# Altium PCB WLC-v0.0.PcbDoc
Units mm, origin at the board's own origin, x right, y up, seen from the top; angles counter-clockwise.
Board outline 99.9 x 99.9 mm, 2 copper layers (Top Layer, Bottom Layer); 50 components, 53 nets, 186 pads, 42 vias.
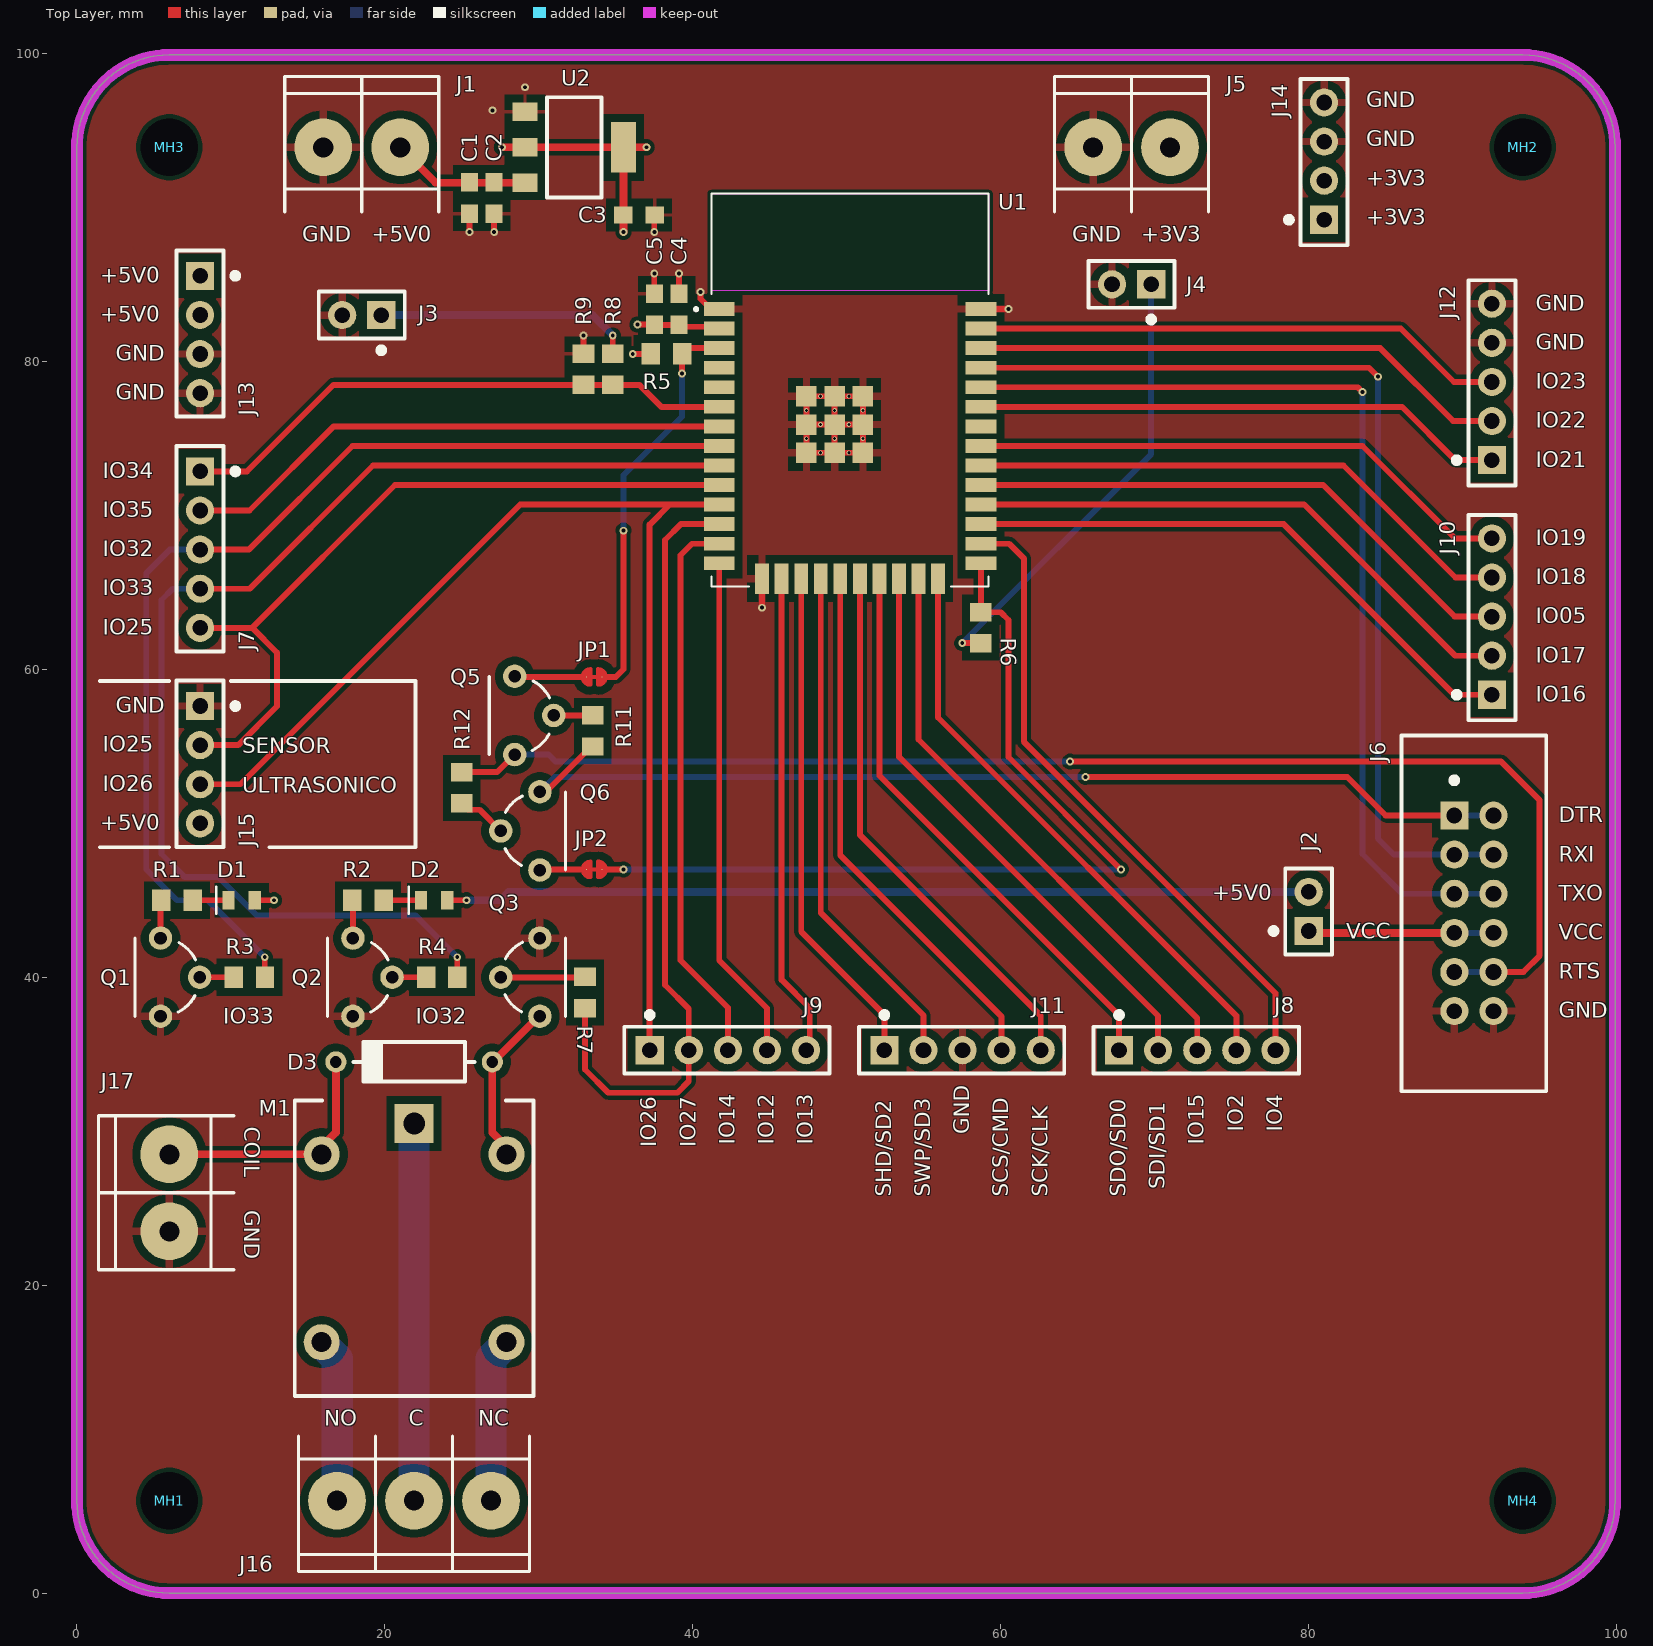
[diagram p0: Top Layer view]
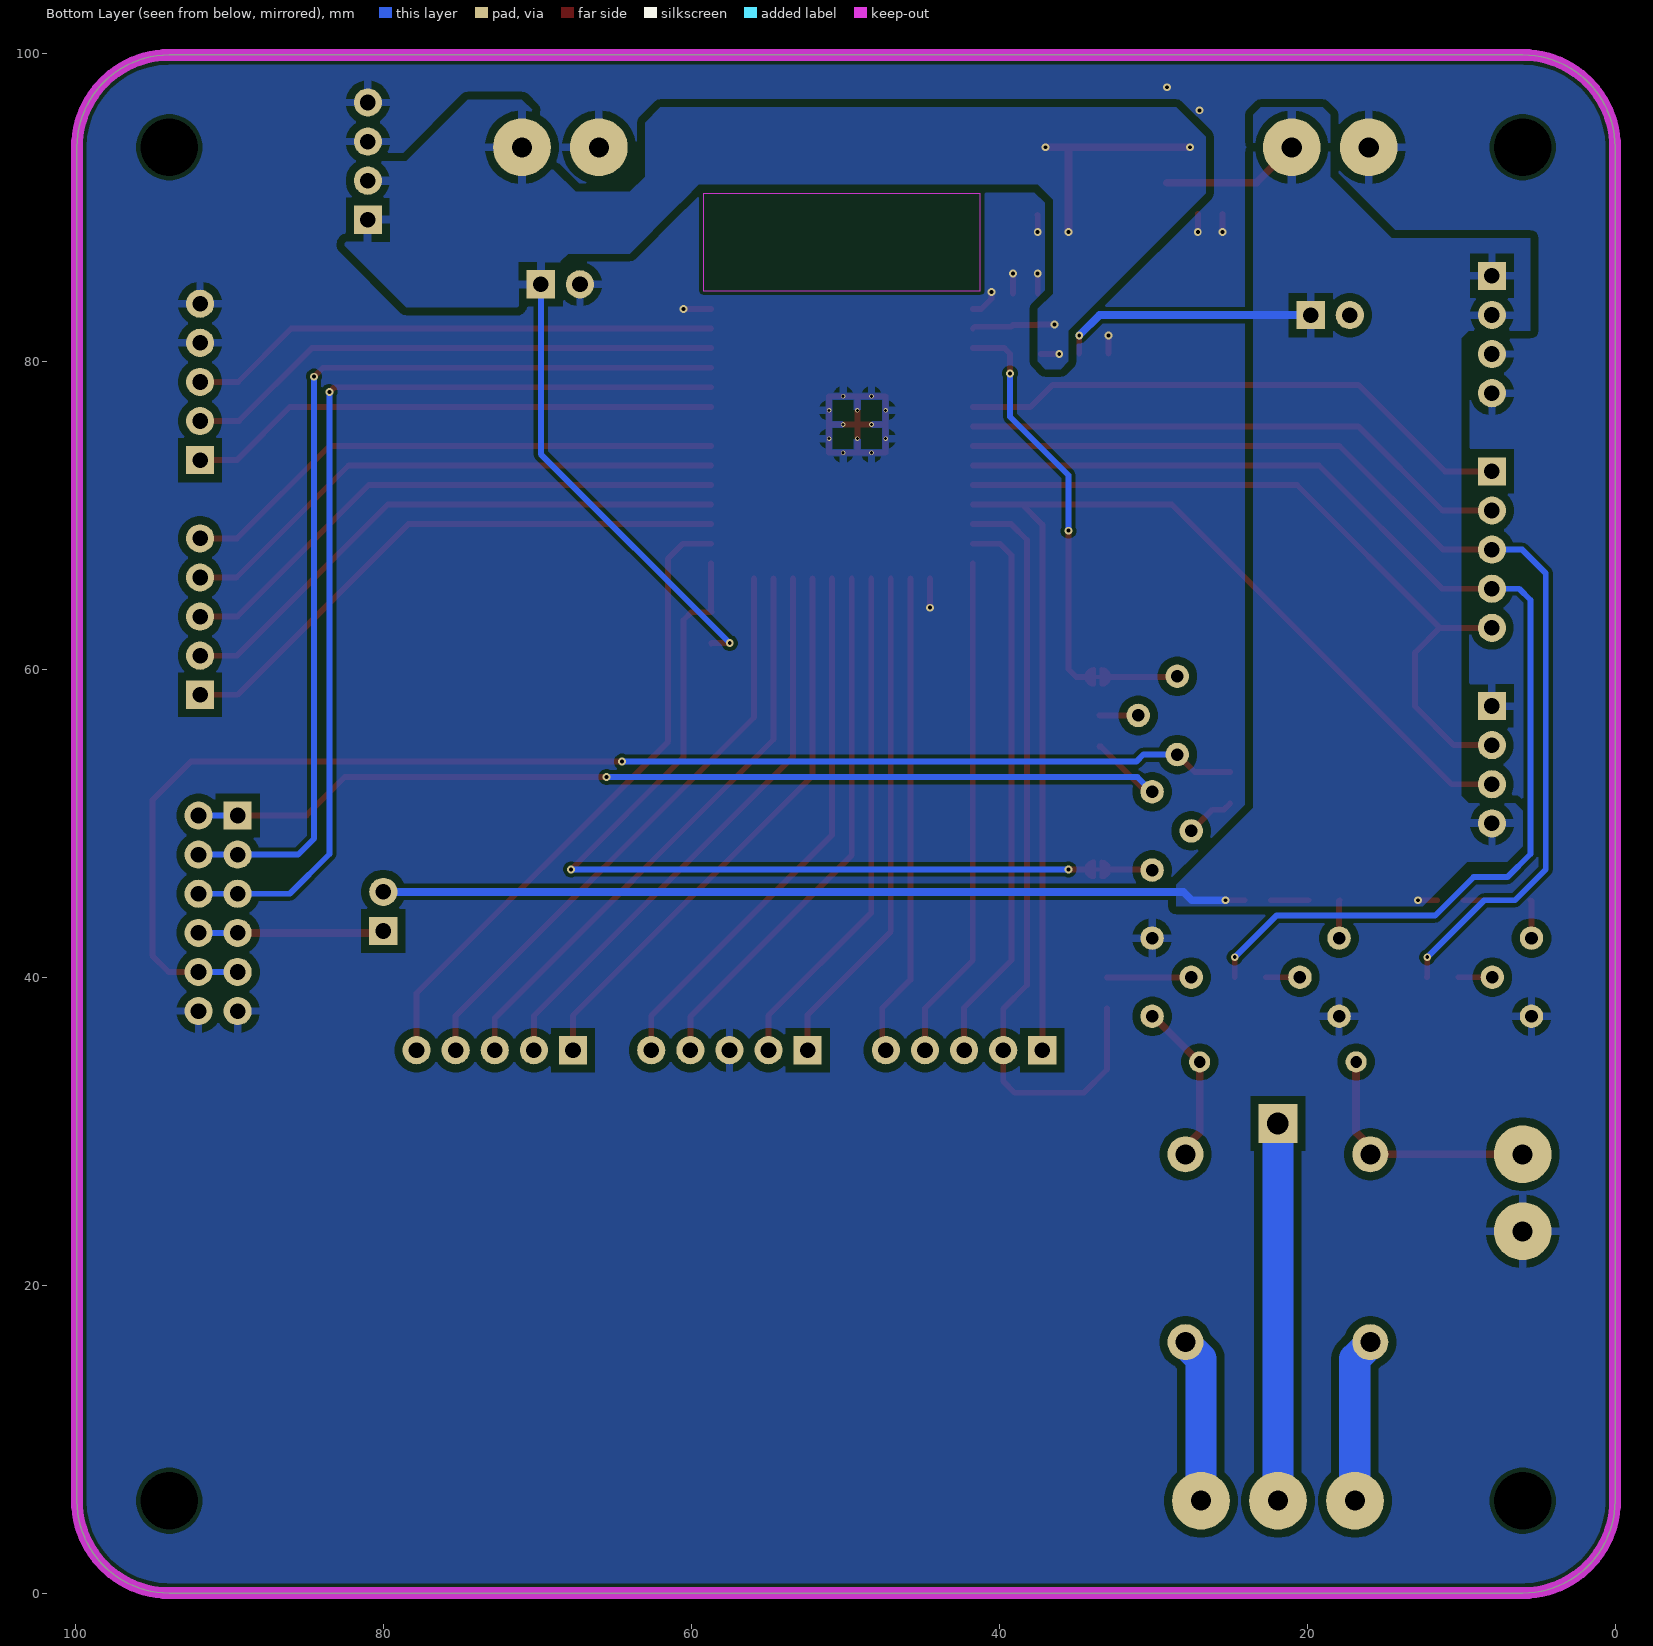
[diagram p1: Bottom Layer view, seen from below]
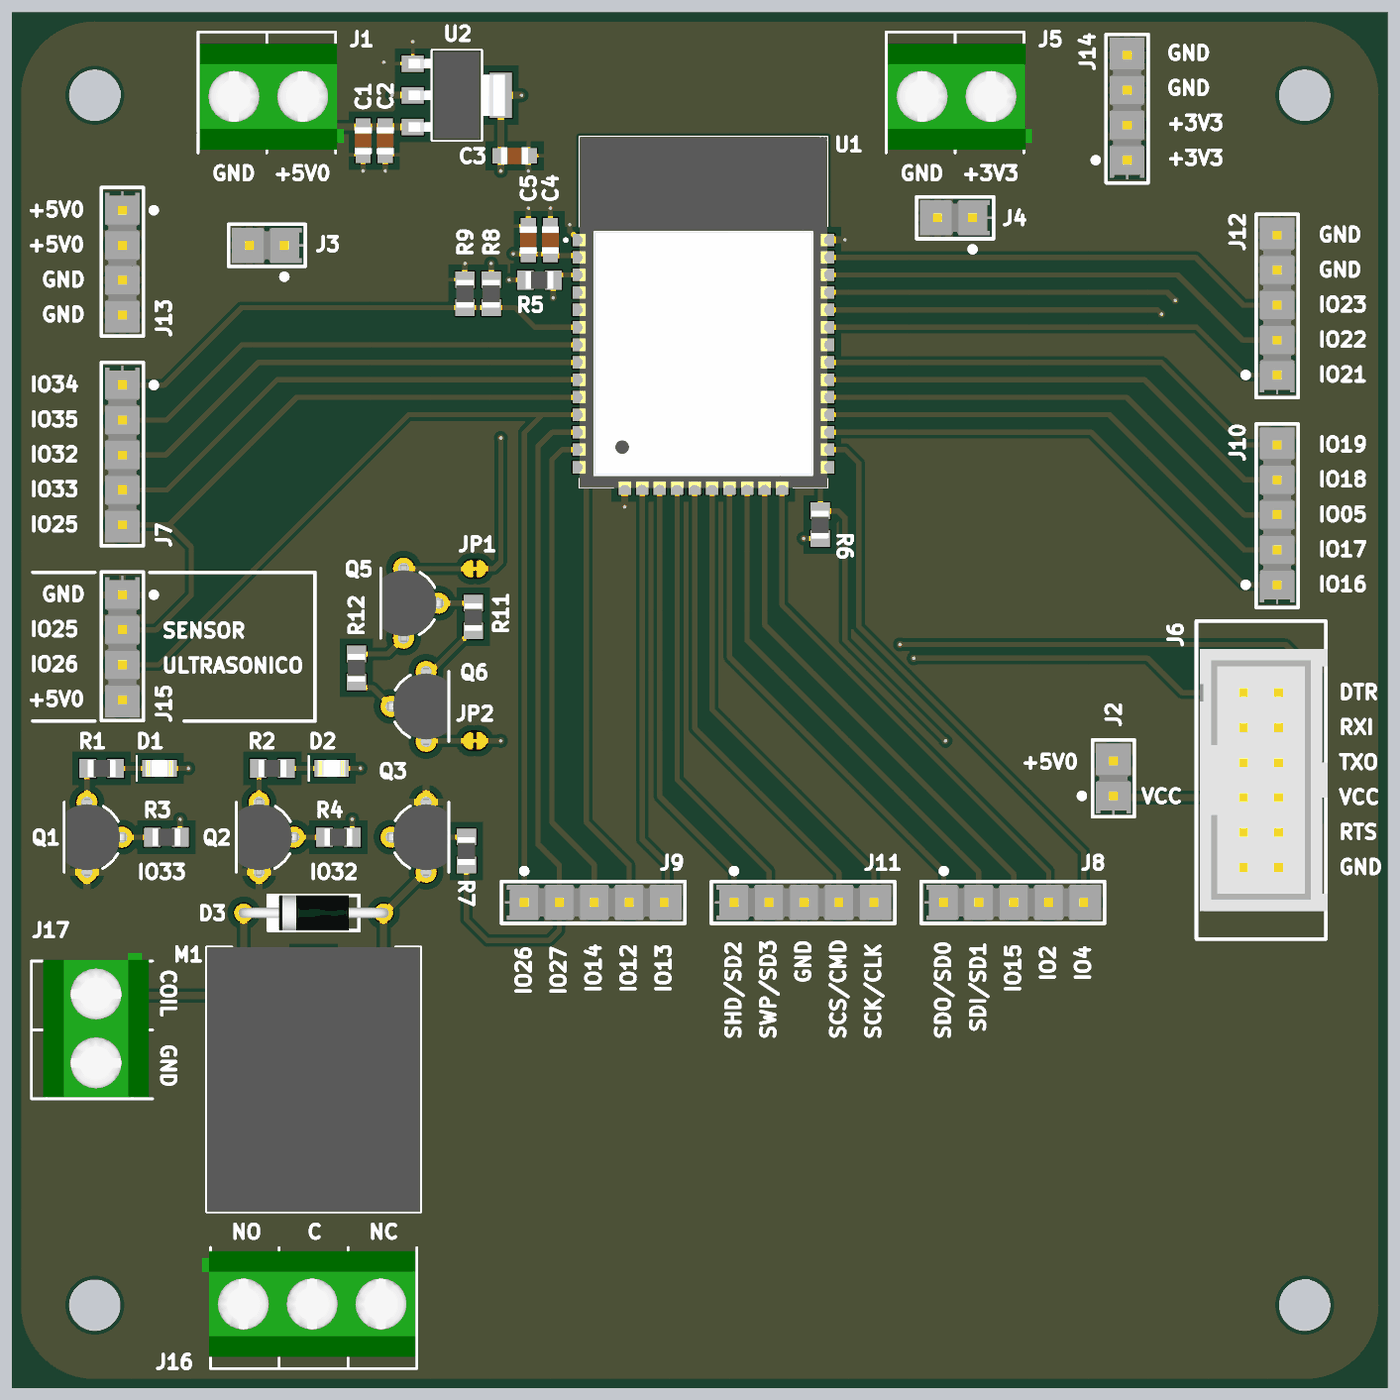
[diagram p2: 3D render of the assembled board from above, using the file's embedded part models]

## Layer stack, top to bottom
Top Solder: solder mask 0.0102, Solder Resist, Dk 3.5
Top Layer: signal copper 0.0356
Dielectric 1: dielectric 0.32, FR-4, Dk 4.8
Bottom Layer: signal copper 0.0356
Bottom Solder: solder mask 0.0102, Solder Resist, Dk 3.5

## Board outline
6,0 cw(c6,6) 0,6 0,93.9 cw(c6,93.9) 6,99.9 93.9,99.9 cw(c93.9,93.9) 99.9,93.9 99.9,6 cw(c93.9,6) 93.9,0

## Design rules (kind name [scope] priority, off if disabled: settings)
Clearance Clearance_Poly2Poly [InPolygon vs InPolygon] p1: gap=0.508 ignorepadtopadclearanceinfootprint=FALSE
Clearance Clearance_Poly2JMP [HasFootprint('JUMPNC') OR InNetClass('LINE') vs InPolygon] p2: gap=0.508 ignorepadtopadclearanceinfootprint=FALSE
Clearance [All] p3: gap=0.254 ignorepadtopadclearanceinfootprint=FALSE except(0.152: SMDPad-Via; 0.508: SMDPad-Fill SMDPad-Poly SMDPad-Region THPad-Fill THPad-Poly THPad-Region)
HoleSize [All] p1: absolutevalues=TRUE maxlimit=5.08 minlimit=0.025 maxpercent=80.000 minpercent=20.000
MinimumAnnularRing MinimumAnnularRing_ESP32 [HasFootprint('ESP32-WROOM-32')] p1: minimumring=0.05
MinimumAnnularRing [All] p2: minimumring=0.127
MinimumSolderMaskSliver [All] p1: minsoldermaskwidth=0.127
PolygonConnect PolygonConnect_ESP32 [HasFootprint('ESP32-WROOM-32') vs InNet('GND')] p1: connectstyle=Relief reliefconductorwidth=0.508 reliefentries=4 polygonreliefangle="90 Angle" airgapwidth=0.508
PolygonConnect [All] p2: thpad.connectstyle=Relief thpad.reliefconductorwidth=0.508 thpad.reliefentries=4 thpad.polygonreliefangle="90 Angle" thpad.airgapwidth=0.508 smdpad.connectstyle=Relief smdpad.reliefconductorwidth=0.254 smdpad.reliefentries=4 smdpad.polygonreliefangle="90 Angle" smdpad.airgapwidth=0.508 via.connectstyle=Direct via.reliefconductorwidth=0.254 via.reliefentries=4 via.polygonreliefangle="90 Angle" via.airgapwidth=0.254
RoutingVias [All] p1: holewidth=0.254 width=0.508 viastyle="Through Hole" minholewidth=0.254 minwidth=0.508 maxholewidth=0.254 maxwidth=0.508
ShortCircuit ShortCircuit_JUMPNC [HasFootprint('JUMPNC') vs InNet('UEN') OR InNet('UBOOT') OR InNet('NetJP*')] p1: allowed=TRUE
ShortCircuit [All] p2: allowed=FALSE
SolderMaskExpansion [All] p1: expansion=0.102 istentingtop=FALSE
SupplyNets "Schematic Supply Nets_2" [InNet('+5V0')] p1: voltage=0.000
SupplyNets "Schematic Supply Nets_1" [InNet('GND')] p2: voltage=0.000
SupplyNets "Schematic Supply Nets" [InNet('+3V3')] p3: voltage=0.000
UnRoutedNet [All] p1: checkbadconnections=TRUE
Width Width_Line [InNetClass('LINE')] p1: maxlimit=2.032 minlimit=2.032 preferedwidth=2.032
Width [All] p2: maxlimit=0.508 minlimit=0.254 preferedwidth=0.381
26 further rules are at their usual default settings.

## Classes and differential pairs
net class LINE: C NC NO
component class MountHole: MH1 MH2 MH3 MH4

## Components (designator, comment, footprint, x,y, rotation, side; value= is the part's Value field where it differs from the comment)
C1 "0.1uF" 0805-CAP-TDK 25.5,90.6 r90 top
C2 "10uF" 0805-CAP-TDK 27.1,90.6 r90 top
C3 "0.1uF" 0805-CAP-TDK 36.5,89.5 r180 top
C4 "0.1uF" 0805-CAP-TDK 39.1,83.384 r270 top
C5 "10uF" 0805-CAP-TDK 37.5,83.384 r270 top
D1 "NCD0805G1" LED-0805 10.7,45 r0 top
D2 "NCD0805G1" LED-0805 23.2,45 r0 top
D3 "1N4148" DO41 21.9,34.5 r180 top
J1 "BLOCK2X1" BLOCK2 18.5,93.9 r270 top
J2 "CON1X2" SIP1X2 80,44.27 r0 top
J3 "CON1X2" SIP1X2 18.5,83 r90 top
J4 "CON1X2" SIP1X2 68.5,85 r90 top
J5 "BLOCK2X1" BLOCK2 68.5,93.9 r270 top
J6 "CON6X2-SH" SIP6X2-SH 90.73,44.15 r270 top
J7 "CON1X5" SIP1X5 8,67.77 r180 top
J8 "CON1X5" SIP1X5 72.76,35.26 r270 top
J9 "CON1X5" SIP1X5 42.28,35.26 r270 top
J10 "CON1X5" SIP1X5 91.9,63.42 r0 top
J11 "CON1X5" SIP1X5 57.52,35.26 r270 top
J12 "CON1X5" SIP1X5 91.9,78.66 r0 top
J13 "CON1X4" SIP1X4 8,81.74 r180 top
J14 "CON1X4" SIP1X4 81,93 r0 top
J15 "SNSAUX" SIP1X4 8,53.8 r180 top
J16 "BLOCK3X1" BLOCK3 21.9,6 r90 top
J17 "BLOCK2X1" BLOCK2 6,26 r0 top
JP1 "JMP-NC" JUMPNC 33.6,59.5 r180 top
JP2 "JMP-NC" JUMPNC 33.6,47 r0 top
M1 "RELE SIMPLE" HRJ-3FF-Form-C 21.9,22.4 r270 top
MH1 "MH-3.75MM" MH-3.75mm-NP 6,6 r0 top locked
MH2 "MH-3.75MM" MH-3.75mm-NP 93.9,93.9 r0 top locked
MH3 "MH-3.75MM" MH-3.75mm-NP 6,93.9 r0 top locked
MH4 "MH-3.75MM" MH-3.75mm-NP 93.9,6 r0 top locked
Q1 "NPN" TO92 6.7,40 r90 top
Q2 "NPN" TO92 19.2,40 r90 top
Q3 "" TO92 28.8,40 r270 top
Q5 "NPN" TO92 29.7,57 r90 top
Q6 "NPN" TO92 28.8,49.5 r270 top
R1 "1K/1%" 0805-RES-PANASONIC 6.5,45 r0 top
R2 "1K/1%" 0805-RES-PANASONIC 18.9,45 r0 top
R3 "10K" 0805-RES-PANASONIC 11.2,40 r0 top
R4 "10K" 0805-RES-PANASONIC 23.7,40 r0 top
R5 "10K" 0805-RES-PANASONIC 38.3,80.484 r0 top
R6 "10K" 0805-RES-PANASONIC 58.7,62.7 r90 top
R7 "10K" 0805-RES-PANASONIC 33,39 r90 top
R8 "10K" 0805-RES-PANASONIC 34.8,79.484 r90 top
R9 "10K" 0805-RES-PANASONIC 32.9,79.484 r270 top
R11 "10K" 0805-RES-PANASONIC 33.5,56 r90 top
R12 "10K" 0805-RES-PANASONIC 25,52.3 r270 top
U1 "ESP32-WROOM-32" ESP32-WROOM-32 49.215,75.894 r0 top locked
U2 "LD1117S33CTR" SOT223-ST 32.3,93.9 r180 top

## Footprints (in the part's own frame and the unit in brackets; to place one, negate y for a bottom-side part, rotate by r counter-clockwise, add the part's x,y. Pads: shape width x height; smd on the part's side, far side on the other; paste and mask are expansions set on the pad)
0805-CAP-TDK [mm]
  rect 1.2x1.1 smd: 1(-1.016,0) 2(1.016,0)
  body extent -1,-0.63 1,0.63, height 1.45
0805-RES-PANASONIC [mm]
  rect 1.2x1.4 smd: 1(-1.016,0) 2(1.016,0)
  body extent -1,-0.63 1,0.63, height 0.6
BLOCK2 [mm] "Bornera con Tornillos 5mm separacion"
  round 3.75 hole 1.3: 1(0,2.5) 2(0,-2.5)
  silkscreen extent -4.6,-5 4.19,5, body extent -3.76,-4.89 3.94,5.61, height 10
BLOCK3 [mm] "Bornera con Tornillos 5mm separacion"
  round 3.75 hole 1.3: 1(0,5) 2(0,0) 3(0,-5)
  silkscreen extent -4.6,-7.5 4.19,7.5, body extent -3.76,-7.39 3.94,8.11, height 10.05
DO41 [mil]
  round 54 hole 30: 1(-200,0) 2(200,0)
  silkscreen extent -155,-51 155,51, body extent -215,-51 215,51, height 80
ESP32-WROOM-32 [mm]
  rect 2x0.9 smd: 1(-7.5,7.5) 2(-7.5,6.23) 3(-7.5,4.96) 4(-7.5,3.69) 5(-7.5,2.42) 6(-7.5,1.15) 7(-7.5,-0.12) 8(-7.5,-1.39) 9(-7.5,-2.66) 10(-7.5,-3.93) 11(-7.5,-5.2) 12(-7.5,-6.47) 13(-7.5,-7.74) 14(-7.5,-9.01) 25(9.5,-9.01) 26(9.5,-7.74) 27(9.5,-6.47) 28(9.5,-5.2) 29(9.5,-3.93) 30(9.5,-2.66) 31(9.5,-1.39) 32(9.5,-0.12) 33(9.5,1.15) 34(9.5,2.42) 35(9.5,3.69) 36(9.5,4.96) 37(9.5,6.23) 38(9.5,7.5)
  rect 0.9x2 smd: 15(-4.715,-10.01) 16(-3.445,-10.01) 17(-2.175,-10.01) 18(-0.905,-10.01) 19(0.365,-10.01) 20(1.635,-10.01) 21(2.905,-10.01) 22(4.175,-10.01) 23(5.445,-10.01) 24(6.715,-10.01)
  rect 1.33x1.33 smd paste-0.15: 39(-1.835,1.835) 40(0,1.835) 41(1.835,1.835) 42(-1.835,0) 43(0,0) 44(1.835,0) 45(-1.835,-1.835) 46(0,-1.835) 47(1.835,-1.835)
  Keep-Out Layer region: 10,8.69 -8,8.69 -8,14.99 10,14.99
  Keep-Out Layer region: 10,8.69 -8,8.69 -8,14.99 10,14.99
  silkscreen extent -9.1,-10.51 10,14.99, body extent -8,-10.51 10,14.99, height 3.2
HRJ-3FF-Form-C [mm]
  rect 2.52x2.52 hole 1.4: 1(-8.1,0)
  round 2.34 hole 1.3: 2(-6.1,-6) 3(6.1,-6) 4(6.1,6) 5(-6.1,6)
  silkscreen extent -9.6,-7.75 9.6,7.75, body extent -9.6,-7.75 9.6,7.75, height 14.7
JUMPNC [mil]
  round 1 smd paste-99999 mask+9.84: 1(-19.68,0) 2(19.68,0)
  Top Layer region: -9.68,-20 -18.36,-18.02 -25.32,-12.47 -29.18,-4.45 -29.18,4.45 -25.32,12.47 -18.36,18.02 -9.68,20 -9.68,20
  Top Layer region: 9.68,20 18.36,18.02 25.32,12.47 29.18,4.45 29.18,-4.45 25.32,-12.47 18.36,-18.02 9.68,-20 9.68,-20
  Top Layer lines w10: 19.68,0 9.68,0 ; -19.68,0 -9.68,0 9.68,0 ; 9.68,0 9.68,-20 ccw(c9.68,0) 29.68,0 ccw(c9.68,0) 9.68,20 9.68,0 ; -9.68,20 ccw(c-9.68,0) -9.68,-20 -9.68,20
LED-0805 [mm]
  rect 0.8x1.2 smd: 1(0.85,0) 2(-0.85,0)
  silkscreen extent -1.65,-0.89 -1.65,0.89, body extent -1,-0.63 1,0.63, height 0.75
MH-3.75mm-NP [mm]
  round 3 hole 3.75 unplated: 1(0,0)
SIP1X2 [mil]
  rect 72x72 hole 40: 1(0,-50)
  round 72 hole 40: 2(0,50)
  silkscreen extent -100,-110 60,110, body extent -50,-105 50,100, height 330
SIP1X4 [mil]
  rect 72x72 hole 40: 1(0,-150)
  round 72 hole 40: 2(0,-50) 3(0,50) 4(0,150)
  silkscreen extent -100,-215 60,210, body extent -50,-205 50,200, height 330
SIP1X5 [mil]
  rect 72x72 hole 40: 1(0,-200)
  round 72 hole 40: 2(0,-100) 3(0,0) 4(0,100) 5(0,200)
  silkscreen extent -100,-265 60,260, body extent -50,-255 50,250, height 330
SIP6X2-SH [mil]
  rect 72x72 hole 40: 1(-250,-50)
  round 72 hole 40: 2(-250,50) 3(-150,-50) 4(-150,50) 5(-50,-50) 6(-50,50) 7(50,-50) 8(50,50) 9(150,-50) 10(150,50) 11(250,-50) 12(250,50)
  silkscreen extent -455,-185 455,185, body extent -375,-175 375,190, height 350
SOT223-ST [mm]
  rect 1.6x1.2 smd: 1(3.2,-2.3) 2(3.2,0) 3(3.2,2.3)
  rect 1.6x3.3 smd: 4(-3.2,0)
  silkscreen extent -1.78,-3.25 1.78,3.25, body extent -3.5,-3.25 3.5,3.25, height 1.65
TO92 [mil]
  round 60 hole 32: 1(0,-50) 2(100,50) 3(-100,50)
  silkscreen extent -100,-39 100,115, body extent -110,-61 110,110, height 315

## Part data
C1 C3 C4: library part CAP-SMD, JLCPart=C307331
C2 C5: library part CAP-SMD, JLCPart=C96446
D1 D2: "Green 65mW 0805 Light Emitting Diodes (LED)", JLCPart=C84260
D3: "100V 500mW 1V@10mA 4ns 200mA DO-35  Switching Diode", JLCPart=C258182
J6: "Connector Header Through Hole 12 position 0.100\" (2.54mm)"
J15: library part CON1X4
JP1 JP2: "Jumper Pad NC"
Q1 Q2 Q3 Q5 Q6: library part "NPN TRANSISTOR", "NPN Transistor"
R1 R2: library part RES-SMD, JLCPart=C11702
R3 R4 R5 R6 R7 R8 R9 R11 R12: library part RES-SMD, JLCPart=C25744
U1: "Bluetooth, WiFi 802.11b/g/n, Bluetooth v4.2 +EDR, Class 1, 2 and 3 Transceiver Module 2.4GHz ~ 2.5GHz Antenna Not Included, U.FL Surface Mount"
U2: "Linear Voltage Regulator IC 3V3 Positive Fixed 1 Output 800mA SOT-223", JLCPart=C35879, Digikey_PN=497-1241-1-ND
MH1 MH2 MH3 MH4: ClassName=MountHole

## Via types
v1: diameter 0.508, hole 0.254, Top Layer to Bottom Layer, tented both sides, 30 vias
v2: diameter 0.3, hole 0.2, Top Layer to Bottom Layer, tented both sides, 12 vias

## Nets (pads, with @x,y where several pads share a name; then routed paths per layer and width w, separated by ;. In a path a pad name is that pad's centre, name@x,y a point inside that pad or via, vN(x,y) a via of type N, cw(c..) or ccw(c..) an arc to the next point about the centre after c; other vN are vias at no path point)
+3V3: C3.2 C4.2 C5.2 J4.1 J5.1 J14.1 J14.2 R5.1 R6.1 U1.2 U2.2 U2.4 | length 51.1
  Top Layer w0.381: v1(36.1,80.484) R5.1 ; v1(36.4,82.384) C5.2@37.484,82.384 ; C5.2 C4.2 39.222,82.246 41.593,82.246 U1.2 ; v1(57.5,61.7) 58.684,61.7 R6.1
  Top Layer w0.508: v1(27.6,93.9) U2.2 U2.4 ; v1(35.5,88.4) U2.4 ; v1(37,93.9) U2.4
  Bottom Layer w0.381: v1(57.5,61.7) 69.77,73.97 J4.1
+5V0: C1.2 C2.2 D1.1 D2.1 J1.1 J2.2 J3.1 J13.1 J13.2 J15.4 R8.2 U2.3 | length 83.2
  Top Layer w0.381: D1.1 v1(12.8,45) ; D2.1 v1(25.3,45) ; R8.2 v1(34.8,81.684)
  Top Layer w0.508: J1.1 23.3,91.6 U2.3
  Bottom Layer w0.508: J3.1 33.484,83 v1(34.8,81.684) ; v1(25.3,45) 27.5,45 28.04,45.54 J2.2
C: J16.2 M1.1 | length 24.5
  Bottom Layer w2.032: J16.2 M1.1
COIL: D3.2 J17.1 M1.2 | length 16.3
  Top Layer w0.508: J17.1 M1.2 15.9,28.996 16.82,29.916 D3.2
DTR: J6.1 J6.2 Q6.3 R11.1 | length 68
  Top Layer w0.381: Q6.3 30.289,52.259 30.675,52.259 33.4,54.984 R11.1 ; v1(65.5,53) 82.5,53 85,50.5 J6.1
  Bottom Layer w0.381: Q6.3 31.03,53 v1(65.5,53) ; J6.1 J6.2
GND: C1.1 C2.1 C3.1 C4.1 C5.1 J1.2 J3.2 J4.2 J5.2 J6.11 J6.12 J11.3 J12.4 J12.5 J13.3 J13.4 J14.3 J14.4 J15.1 J17.2 Q1.3 Q2.3 Q3.3 R9.1 U1.1 U1.15 U1.38 U1.39 U1.40 U1.41 U1.42 U1.43 U1.44 U1.45 U1.46 U1.47 U2.1 | length 34.9
  Top Layer w0.381: v1(25.5,88.4) C1.1 ; v1(27.1,88.4) C2.1 ; R9.1 v1(32.9,81.684) ; C5.1 v1(37.5,85.7) ; v1(37.5,88.4) 37.5,89.484 C3.1 ; C4.1 v1(39.1,85.7) ; v1(40.5,84.5) 40.5,84.059 41.165,83.394 U1.1 ; v1(44.5,64) U1.15 ; U1.38 58.718,83.397 60.497,83.397 v1(60.5,83.4) ; U1.42 v2(48.298,75.894) U1.43 ; U1.42 v2(47.38,76.812) U1.39 v2(48.298,77.729) U1.40 ; U1.42 v2(47.38,74.977) U1.45 v2(48.298,74.059) U1.46 ; U1.46 v2(49.215,74.977) U1.43 ; U1.46 v2(50.133,74.059) U1.47 v2(51.05,74.977) U1.44 ; U1.43 v2(49.215,76.812) U1.40 ; U1.43 v2(50.133,75.894) U1.44 ; U1.40 v2(50.133,77.729) U1.41 v2(51.05,76.812) U1.44
  other v1: 27,96.3 29.1,97.8
IO2: J8.4 U1.24 | length 38.6
  Top Layer w0.381: U1.24 55.93,56.87 75.3,37.5 J8.4
IO4: J8.5 U1.26 | length 41.9
  Top Layer w0.381: U1.26 60.546,68.154 61.5,67.2 61.5,55.3 77.84,38.96 J8.5
IO5: J10.3 U1.29 | length 36.7
  Top Layer w0.381: U1.29 80.936,71.964 89.48,63.42 J10.3
IO12: J9.4 U1.14 | length 32.9
  Top Layer w0.381: U1.14 41.715,41.085 44.82,37.98 J9.4
IO13: J9.5 U1.16 | length 31.5
  Top Layer w0.381: U1.16 45.77,39.83 47.6,38 47.6,35.5 J9.5
IO14: J9.3 U1.13 | length 36.2
  Top Layer w0.381: U1.13 39.954,68.154 39.2,67.4 39.2,41.1 42.28,38.02 J9.3
IO15: J8.3 U1.23 | length 38.1
  Top Layer w0.381: U1.23 54.66,55.44 72.76,37.34 J8.3
IO16: J10.1 U1.27 | length 37.8
  Top Layer w0.381: U1.27 78.376,69.424 89.46,58.34 J10.1
IO17: J10.2 U1.28 | length 37.3
  Top Layer w0.381: U1.28 79.706,70.694 89.52,60.88 J10.2
IO18: J10.4 U1.30 | length 36.2
  Top Layer w0.381: U1.30 82.266,73.234 89.54,65.96 J10.4
IO19: J10.5 U1.31 | length 35.7
  Top Layer w0.381: U1.31 83.496,74.504 89.5,68.5 J10.5
IO21: J12.1 U1.33 | length 34.6
  Top Layer w0.381: U1.33 86.056,77.044 89.52,73.58 J12.1
IO22: J12.2 U1.36 | length 35.1
  Top Layer w0.381: U1.36 84.646,80.854 89.38,76.12 J12.2
IO23: J12.3 U1.37 | length 34.6
  Top Layer w0.381: U1.37 85.976,82.124 89.44,78.66 J12.3
IO25: J7.5 J15.2 U1.10 | length 49.4
  Top Layer w0.381: J15.2 10.47,55.07 13,57.6 13,61.08 11.39,62.69 ; J7.5 11.39,62.69 ; U1.10 20.664,71.964 11.39,62.69
IO26: J9.1 J15.3 U1.11 | length 77.2
  Top Layer w0.381: J15.3 10.63,52.53 28.794,70.694 38.5,70.694 ; J9.1 37.2,69.394 38.5,70.694 ; U1.11 38.5,70.694
IO27: J9.2 R7.1 U1.12 | length 51.4
  Top Layer w0.381: R7.1 33,34 34.5,32.5 39,32.5 39.74,33.24 J9.2 39.74,37.96 38.2,39.5 38.2,68.4 39.224,69.424 U1.12
IO32: J7.3 R3.2 U1.8 | length 71.2
  Top Layer w0.381: J7.3 11.17,67.77 17.904,74.504 U1.8 ; v1(12.2,41.3) 12.2,40.016 R3.2
  Bottom Layer w0.381: J7.3 6.03,67.77 4.5,66.24 4.5,47 6.5,45 8.5,45 v1(12.2,41.3)
IO33: J7.4 R4.2 U1.9 | length 79.6
  Top Layer w0.381: J7.4 11.23,65.23 19.234,73.234 U1.9 ; R4.2@24.7,40.016 v1(24.7,41.3)
  Bottom Layer w0.381: J7.4 6.23,65.23 5.5,64.5 5.5,48 7,46.5 9.2,46.5 11.7,44 22,44 v1(24.7,41.3)
IO34: J7.1 R8.1 R9.2 U1.6 | length 36.6
  Top Layer w0.381: J7.1 11.05,72.85 16.668,78.468 R9.2 R8.1 36.532,78.468 37.956,77.044 U1.6
IO35: J7.2 U1.7 | length 36
  Top Layer w0.381: J7.2 11.21,70.31 16.674,75.774 U1.7
NC: J16.3 M1.4 | length 10.7
  Bottom Layer w2.032: J16.3 26.9,15.217 27.9,16.217 M1.4
NetD1_2: D1.2 R1.2 | length 2.3
  Top Layer w0.381: R1.2 D1.2
NetD2_2: D2.2 R2.2 | length 2.4
  Top Layer w0.381: R2.2 D2.2
NetD3_1: D3.1 M1.5 Q3.2 | length 10.7
  Top Layer w0.508: M1.5 27.9,28.996 26.98,29.916 D3.1 27.045,34.5 30.005,37.46 Q3.2
NetJP1_2: JP1.2 Q5.2 | length 4.7
  Top Layer w0.254: 32.846,59.5 JP1.2
  Top Layer w0.381: Q5.2 28.47,59.5 32.846,59.5
NetJP2_1: JP2.1 Q6.2 | length 3
  Top Layer w0.254: Q6.2 Q6.2@30.11,47
  Top Layer w0.381: Q6.2@30.11,47 JP2.1
NetQ1_1: Q1.1 R3.1 | length 2.2
  Top Layer w0.381: Q1.1 R3.1
NetQ1_2: Q1.2 R1.1 | length 2.5
  Top Layer w0.381: Q1.2 5.43,44.946 R1.1
NetQ2_1: Q2.1 R4.1 | length 2.2
  Top Layer w0.381: Q2.1 R4.1
NetQ2_2: Q2.2 R2.1 | length 2.5
  Top Layer w0.381: R2.1 17.93,44.954 Q2.2
NetQ3_1: Q3.1 R7.2 | length 5.5
  Top Layer w0.381: Q3.1 27.538,39.992 32.992,39.992 R7.2@33,39.984
NetQ5_1: Q5.1 R11.2 | length 2.5
  Top Layer w0.381: Q5.1 33.484,57 R11.2
NetQ6_1: Q6.1 R12.2 | length 3.3
  Top Layer w0.381: R12.2 25.41,50.874 26.156,50.874 Q6.1
NO: J16.1 M1.3 | length 10.7
  Bottom Layer w2.032: M1.3 15.9,16.217 16.9,15.217 J16.1
RTS: J6.9 J6.10 Q5.3 R12.1 | length 87.8
  Top Layer w0.381: R12.1 27.286,53.316 Q5.3 ; v1(64.5,54) 92.5,54 95,51.5 95,41.4 93.94,40.34 J6.10
  Bottom Layer w0.381: Q5.3 30.64,54.46 31.1,54 v1(64.5,54) ; J6.9 J6.10
RXI: J6.3 J6.4 U1.35 | length 64
  Top Layer w0.381: U1.35 83.916,79.584 v1(84.5,79)
  Bottom Layer w0.381: v1(84.5,79) 84.5,49 85.54,47.96 J6.3 J6.4
SCK/CLK: J11.5 U1.20 | length 35.5
  Top Layer w0.381: U1.20 50.85,49.25 62.6,37.5 J11.5
SCS/CMD: J11.4 U1.19 | length 35
  Top Layer w0.381: U1.19 49.58,47.92 60.06,37.44 J11.4
SDI/SD1: J8.2 U1.22 | length 37.6
  Top Layer w0.381: U1.22 53.39,54.31 70.22,37.48 J8.2
SDO/SD0: J8.1 U1.21 | length 37.1
  Top Layer w0.381: U1.21 52.12,53.08 67.68,37.52 J8.1
SHD/SD2: J11.1 U1.17 | length 32.9
  Top Layer w0.381: U1.17 47.04,42.96 52.44,37.56 J11.1
SWP/SD3: J11.2 U1.18 | length 33.4
  Top Layer w0.381: U1.18 48.31,44.19 54.98,37.52 J11.2
TXO: J6.5 J6.6 U1.34 | length 64.5
  Top Layer w0.381: U1.34 83.186,78.314 v1(83.5,78)
  Bottom Layer w0.381: v1(83.5,78) 83.5,48 86.08,45.42 J6.5 J6.6
UBOOT: JP2.2 R6.2 U1.25 | length 58.1
  Top Layer w0.254: JP2.2 34.354,47
  Top Layer w0.381: 34.354,47 v1(35.5,47) ; R6.2 58.684,63.7 60,63.7 60.5,63.2 60.5,54.3 v1(67.8,47) ; R6.2@58.715,63.716 U1.25
  Bottom Layer w0.381: v1(35.5,47) v1(67.8,47)
UEN: JP1.1 R5.2 U1.3 | length 26.2
  Top Layer w0.381: JP1.1 35,59.5 35.5,60 v1(35.5,69) ; v1(39.3,79.2) 39.3,80.468 R5.2 39.316,80.508 39.662,80.854 U1.3
  Bottom Layer w0.381: v1(35.5,69) 35.5,72.6 39.3,76.4 v1(39.3,79.2)
VCC: J2.1 J6.7 J6.8 | length 12
  Top Layer w0.508: J2.1 80.12,42.88 J6.7
  Bottom Layer w0.381: J6.7 J6.8
pads on no net: MH1.1 MH2.1 MH3.1 MH4.1 U1.4 U1.5 U1.32

## Polygon pours and split planes (outlines as drawn)
GND on Bottom Layer "GND_PLANE" (solid, remove dead copper, pour order 3): 0,0 99.9,0 99.9,99.9 0,99.9 0,90.8
+5V0 on Bottom Layer "+5V0_PLANE" (solid, remove dead copper, pour order 1): 9.5,82 10,81.5 10,51.8 9.5,51.3 6.5,51.3 6,50.8 6,48.5 7,47.5 9.6,47.5 12.5,44.6 28.5,44.6 28.5,46 23.5,51 23.5,96 23,96.5 19,96.5 18.5,96 18.5,92 14.5,88 5.5,88 5.5,82
+3V3 on Bottom Layer "+3V3_PLANE" (solid, remove dead copper, pour order 0): 61,90 64,87 64.9,87 68,87 68.5,86.5 68.5,84 69,83.5 78.5,83.5 82.5,87.5 82.5,92.5 82,93 78.5,93 74.5,97 71,97 69,95 69,92.5 67.5,91 64,91 63,92 63,95.5 62,96.5 28.5,96.5 26.6,94.6 26.6,90.9 35.5,82 35.5,80 36,79.5 37,79.5 37.5,80 37.5,83.4 36.5,84.4 36.5,90.5 37.5,91.5 59.5,91.5 60.5,90.5
GND on Top Layer "GND_PLANE" (solid, remove dead copper, pour order 2): 0,0 99.9,0 99.9,99.9 0,99.9 0,90.8

## Keep-outs
Keep-Out Layer:
  the board outline again, w0.762

## Silkscreen, mask and mechanical layers (free items; w line width, h text height)
Top Overlay:
  lines w0.254: 1.5,48.44 6,48.44 ; 1.5,59.24 6,59.24 ; 10,59.24 22,59.24 22,48.44 12.5,48.44
  text "GND" at 83.754,96.492 h1.02
  text "GND" at 83.754,93.952 h1.02
  text "+3V3" at 83.754,91.412 h1.02
  text "+3V3" at 83.754,88.872 h1.02
  text "GND" at 14.646,87.754 h1.02
  text "+5V0" at 19.138,87.754 h1.02
  text "GND" at 64.646,87.754 h1.02
  text "+3V3" at 69.138,87.754 h1.02
  text "+5V0" at 1.522,85.112 h1.02
  text "GND" at 94.754,83.292 h1.02
  text "+5V0" at 1.522,82.572 h1.02
  text "GND" at 94.754,80.752 h1.02
  text "GND" at 2.538,80.032 h1.02
  text "IO23" at 94.754,78.212 h1.02
  text "GND" at 2.538,77.492 h1.02
  text "IO22" at 94.754,75.672 h1.02
  text "IO21" at 94.754,73.132 h1.02
  text "IO34" at 1.691,72.412 h1.02
  text "IO35" at 1.691,69.872 h1.02
  text "IO19" at 94.754,68.052 h1.02
  text "IO32" at 1.691,67.332 h1.02
  text "IO18" at 94.754,65.512 h1.02
  text "IO33" at 1.691,64.792 h1.02
  text "IO05" at 94.754,62.972 h1.02
  text "IO25" at 1.691,62.252 h1.02
  text "IO17" at 94.754,60.432 h1.02
  text "IO16" at 94.754,57.892 h1.02
  text "GND" at 2.538,57.172 h1.02
  text "IO25" at 1.691,54.632 h1.02
  text "SENSOR" at 10.754,54.532 h1.02
  text "IO26" at 1.691,52.092 h1.02
  text "ULTRASONICO" at 10.754,51.992 h1.02
  text "DTR" at 96.254,50.052 h1.02
  text "+5V0" at 1.522,49.552 h1.02
  text "RXI" at 96.254,47.512 h1.02
  text "+5V0" at 73.722,44.992 h1.02
  text "TXO" at 96.254,44.972 h1.02
  text "VCC" at 82.438,42.492 h1.02
  text "VCC" at 96.254,42.432 h1.02
  text "RTS" at 96.254,39.892 h1.02
  text "GND" at 96.254,37.352 h1.02
  text "IO33" at 9.491,36.992 h1.02
  text "IO32" at 21.991,36.992 h1.02
  text "COIL" at 10.854,30.277 h1.02 r270
  text "IO2" at 75.738,29.967 h1.02 r90
  text "IO4" at 78.278,29.967 h1.02 r90
  text "GND" at 57.958,29.798 h1.02 r90
  text "IO14" at 42.718,29.12 h1.02 r90
  text "IO12" at 45.258,29.12 h1.02 r90
  text "IO13" at 47.798,29.12 h1.02 r90
  text "IO15" at 73.198,29.12 h1.02 r90
  text "IO26" at 37.638,28.951 h1.02 r90
  text "IO27" at 40.178,28.951 h1.02 r90
  text "SDI/SD1" at 70.658,26.243 h1.02 r90
  text "SHD/SD2" at 52.878,25.735 h1.02 r90
  text "SWP/SD3" at 55.418,25.735 h1.02 r90
  text "SCS/CMD" at 60.498,25.735 h1.02 r90
  text "SCK/CLK" at 63.038,25.735 h1.02 r90
  text "SDO/SD0" at 68.118,25.735 h1.02 r90
  text "GND" at 10.854,24.854 h1.02 r270
  text "NO" at 16.054,10.854 h1.02
  text "C" at 21.561,10.854 h1.02
  text "NC" at 26.054,10.854 h1.02
Mechanical 1:
  the board outline again, w0.025

## Text inside footprints (layer, text, board x,y; h text height)
U1: Top Assembly "ANTENNA" at 46.315,87.244 h1.78